# Altium PCB SuscoderPCB.PcbDoc
Units mm, origin at the board's own origin, x right, y up, seen from the top; angles counter-clockwise.
Board outline 25.4 x 25.4 mm, 2 copper layers (Top Layer, Bottom Layer); 11 components, 9 nets, 40 pads, 12 vias.
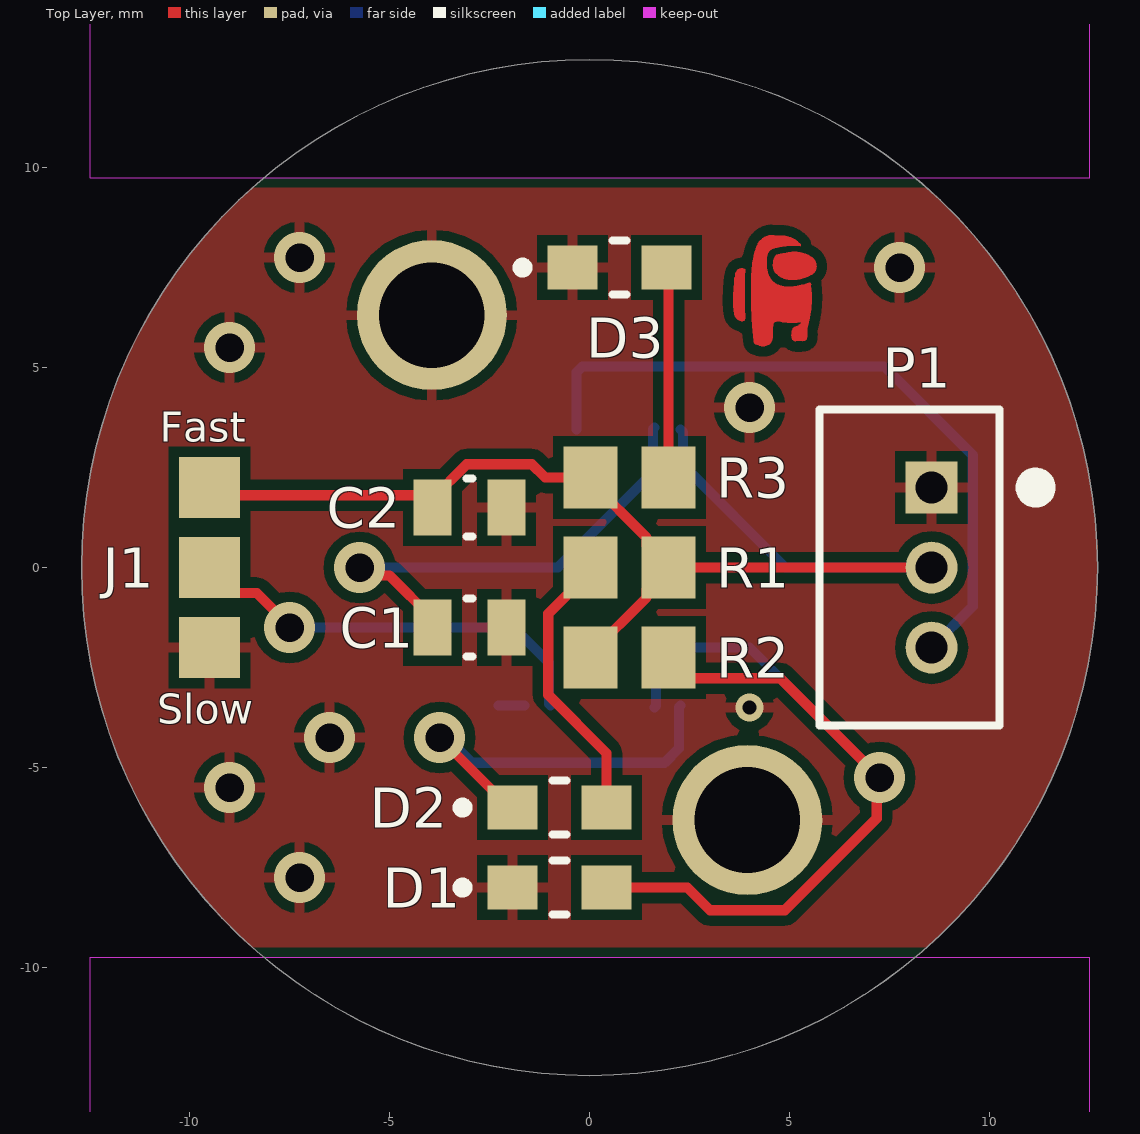
[diagram p0: Top Layer view]
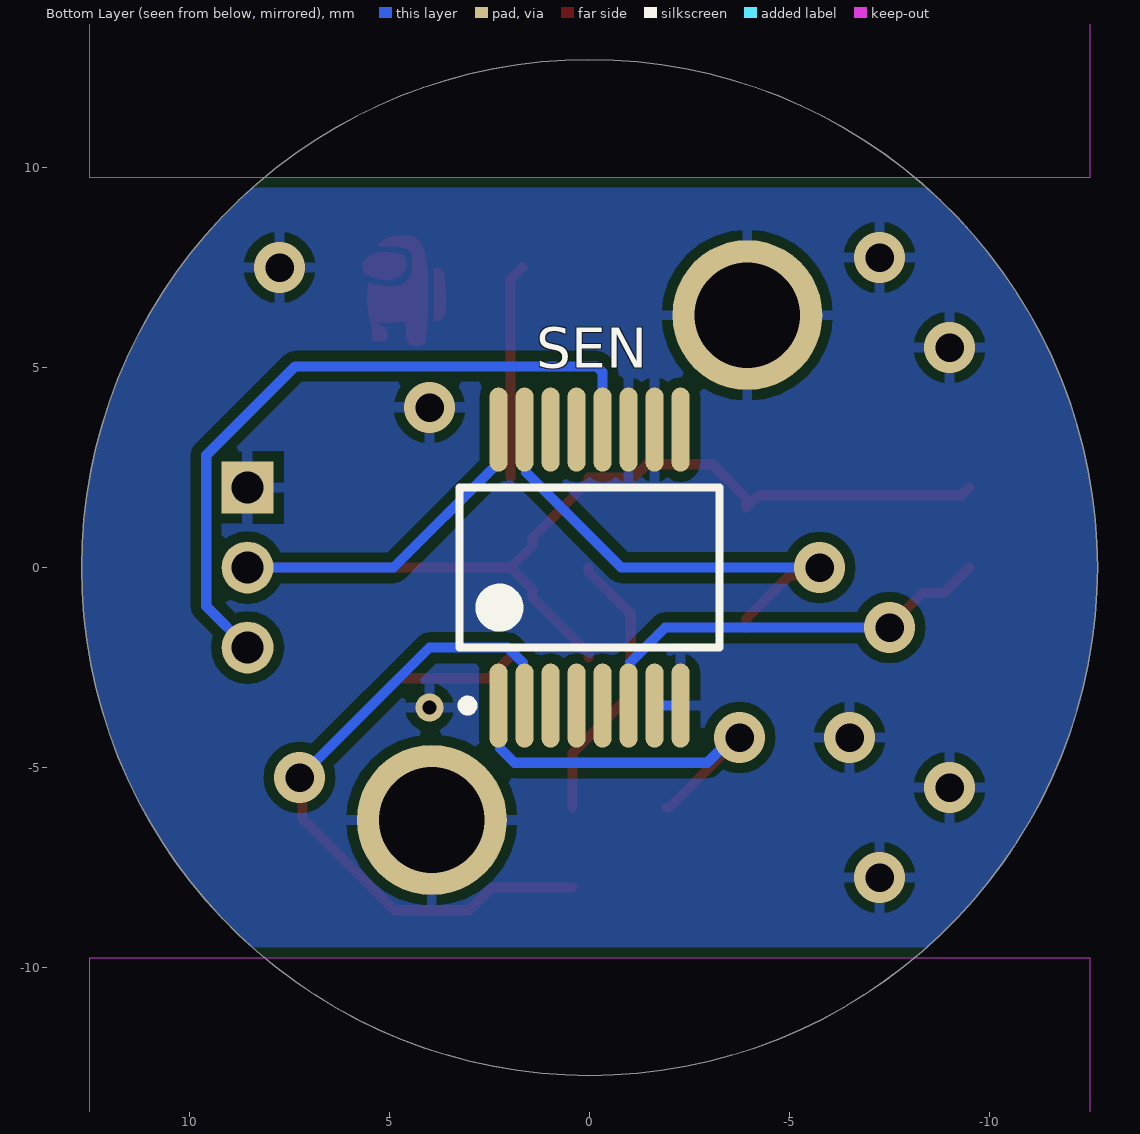
[diagram p1: Bottom Layer view, seen from below]
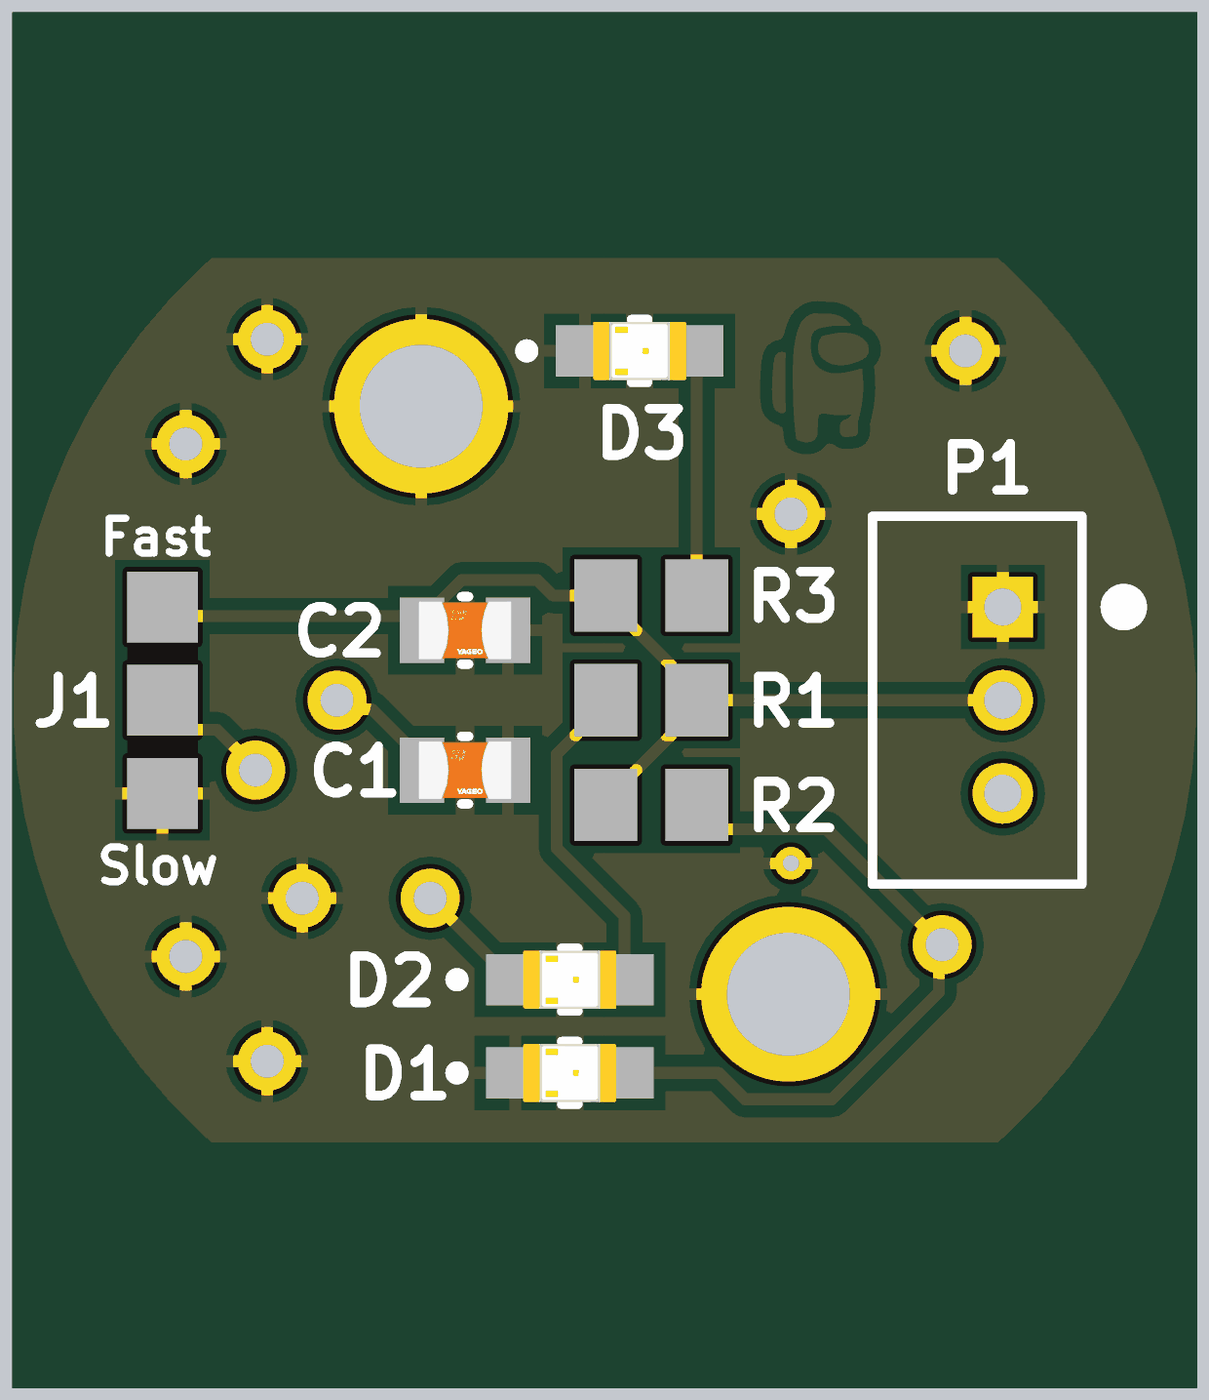
[diagram p2: 3D render of the assembled board from above, using the file's embedded part models]

## Layer stack, top to bottom
Top Solder: solder mask 0.0102, Solder Resist, Dk 3.5
Top Layer: signal copper 0.0356
Dielectric 1: dielectric 0.32, FR-4, Dk 4.8
Bottom Layer: signal copper 0.0356
Bottom Solder: solder mask 0.0102, Solder Resist, Dk 3.5

## Board outline
0,-12.7 cw(c0,0) -12.7,0 cw(c0,0) 0,12.7 cw(c0,0) 12.7,0 cw(c0,0)
cut-out: -12.5,-14.75 12.5,-14.75 12.5,-9.75 -12.5,-9.75
cut-out: -12.5,9.75 12.5,9.75 12.5,14.75 -12.5,14.75

## Design rules (kind name [scope] priority, off if disabled: settings)
Clearance [All] p1: gap=0.254 ignorepadtopadclearanceinfootprint=TRUE except(0: Arc-Hole Track-Hole SMDPad-Hole THPad-Hole Via-Hole Fill-Hole Poly-Hole Region-Hole Text-Hole)
HoleSize [IsVia] p1: absolutevalues=TRUE maxlimit=2.54 minlimit=0.025 maxpercent=80.000 minpercent=20.000
PolygonConnect [All] p1: connectstyle=Relief reliefconductorwidth=0.254 reliefentries=4 polygonreliefangle="90 Angle" airgapwidth=0.254
RoutingVias [All] p1: holewidth=0.711 width=1.27 viastyle="Through Hole" minholewidth=0.711 minwidth=1.27 maxholewidth=0.711 maxwidth=1.27
SolderMaskExpansion [All] p1: expansion=0.102 istentingtop=FALSE
Width [All] p1: maxlimit=0.254 minlimit=0.254 preferedwidth=0.254
29 further rules are at their usual default settings.

## Components (designator, comment, footprint, x,y, rotation, side; value= is the part's Value field where it differs from the comment)
C1 "CC0805KKX7R7BB475" FP-CC0805-0_85-MFG -3,-1.5 r0 top value="4.7 uF"
C2 "CC0805KRX7R7BB104" FP-CC0805-0_85-MFG -3,1.5 r0 top value="100 nF"
D1 "APT2012LZGCK" FP-APT2012LSYCK-J3-PRV-MFG -0.75,-8 r0 top
D2 "APT2012LSECK/J3-PRV" FP-APT2012LSYCK-J3-PRV-MFG -0.75,-6 r0 top
D3 "APT2012LSYCK/J3-PRV" FP-APT2012LSYCK-J3-PRV-MFG 0.75,7.5 r0 top
J1 "Tri-Pad Jumper" "Tri-Pad Jumper-Footprint-1" -9.5,0 r0 top
P1 "B3B-PH-K-S(LF)(SN)" JST-B3B-PH-K-S-3_V 8,0 r270 top
R1 "ERJ-6ENF1501V" RESC2013X70X40ML20T20 1,0 r0 top
R2 "ERJ6ENF1201V" RESC2013X70X40ML20T20 1,-2.25 r180 top
R3 "ERJ-6ENF1501V" RESC2013X70X40ML20T20 1,2.25 r180 top
SEN "AS5045ASST" AMS-SSOP-16-6200X5300DE_A_N 0,0 r90 bottom locked

## Footprints (in the part's own frame and the unit in brackets; to place one, negate y for a bottom-side part, rotate by r counter-clockwise, add the part's x,y. Pads: shape width x height; smd on the part's side, far side on the other; paste and mask are expansions set on the pad)
AMS-SSOP-16-6200X5300DE_A_N [mm] "SOP, 16-Leads, Body 6.2x5.3mm, Pitch 0.65mm, IPC Medium Density"
  oval 2.1x0.45 smd: 1(-3.45,2.275) 2(-3.45,1.625) 3(-3.45,0.975) 4(-3.45,0.325) 5(-3.45,-0.325) 6(-3.45,-0.975) 7(-3.45,-1.625) 8(-3.45,-2.275) 9(3.45,-2.275) 10(3.45,-1.625) 11(3.45,-0.975) 12(3.45,-0.325) 13(3.45,0.325) 14(3.45,0.975) 15(3.45,1.625) 16(3.45,2.275)
  silkscreen extent -3.57,-3.25 2,3.25, body extent -2.8,-3.25 2.8,3.25, height 2
FP-APT2012LSYCK-J3-PRV-MFG [mm]
  rect 1.25x1.1 smd paste+0 mask+0: 1(-1.175,0) 2(1.175,0)
  silkscreen extent -2.55,-0.67 0.18,0.67, body extent -1.9,-0.77 1.9,0.77, height 0.25
FP-CC0805-0_85-MFG [mm]
  rect 0.95x1.4 smd paste+0 mask+0: 1(-0.925,0) 2(0.925,0)
  silkscreen extent -0.07,-0.72 0.08,0.72, body extent -1.6,-1.05 1.6,1.05, height 0.25
JST-B3B-PH-K-S-3_V [mm] "Connector, 3-Leads, Body 7.9x4.5mm, Pitch 2mm"
  rect 1.3x1.3 hole 0.8: 1(-2,0.55)
  round 1.3 hole 0.8: 2(0,0.55) 3(2,0.55)
  silkscreen extent -3.95,-2.25 3.95,3.4, body extent -3.95,-2.25 3.95,2.25, height 6
RESC2013X70X40ML20T20 [mm] "Chip Resistor, 2-Leads, Body 2.00x1.25mm, IPC Low Density"
  rect 1.35x1.55 smd: 1(-0.975,0) 2(0.975,0)
  body extent -1.1,-0.72 1.1,0.72, height 0.7
"Tri-Pad Jumper-Footprint-1" [mil]
  rect 60x60 smd: 1(0,78.74) 2(0,0) 3(0,-78.74)

## Part data
C1: library part CMP-03422-000207-1, "CAP CER 4.7UF 16V X7R 0805", Capacitance="4.7 uF", Manufacturer=Yageo, Package=CC0805-0.85, Temperature="-30°C to +85°C", Temperature Characteristic=X7R, Temperature Range High=+85°C, Temperature Range Low=-30°C, Tolerance=0.1, Voltage Rating="16 V", Automotive=No, Category=Cap, ComponentLink2Description=Datasheet, ComponentLink2URL=http://www.yageo.com/documents/recent/UPY-GPHC_Y5V_6.3V-to-50V_8.pdf, Device Class L1="Passive Components", Device Class L2=Capacitors, Device Class L3="Ceramic Capacitors", Digikey Description="CAP CER 4.7UF 16V X7R 0805", Footprint Url=http://www.yageo.com/exep/pages/download/literatures/UPY-C_GEN_24.pdf, Height=0.95mm, Ipc Land Pattern Name=CAPC200125X85, Lead Free=Yes, Manufacturer Part Number=CC0805KKX7R7BB475, Material=Ceramic, Mouser Description="Multilayer Ceramic Capacitors MLCC - SMD/SMT 4.7M pF 10% 16 Volts", Octopart=https://octopart.com/cc0805kkx7r7bb475-yageo-34429188, RoHS=TRUE
C2: library part CMP-1036-04402-6, "CAP CER 0.1UF 16V X7R 0805", Capacitance="100 nF", Manufacturer=Yageo, Package=CC0805-0.85, Temperature="-30°C to +85°C", Temperature Characteristic=X7R, Temperature Range High=+85°C, Temperature Range Low=-30°C, Tolerance=0.1, Voltage Rating="16 V", Automotive=No, Category=Cap, ComponentLink2Description=Datasheet, ComponentLink2URL=http://www.yageo.com/documents/recent/UPY-GPHC_Y5V_6.3V-to-50V_8.pdf, Device Class L1="Passive Components", Device Class L2=Capacitors, Device Class L3="Ceramic Capacitors", Digikey Description="CAP CER 0.1UF 16V X7R 0805", Footprint Url=http://www.yageo.com/exep/pages/download/literatures/UPY-C_GEN_24.pdf, Height=0.95mm, Ipc Land Pattern Name=CAPC200125X85, Lead Free=Yes, Manufacturer Part Number=CC0805KRX7R7BB104, Material=Ceramic, Mouser Description="Multilayer Ceramic Capacitors MLCC - SMD/SMT 100nF 16V X7R 10%", Octopart=https://octopart.com/cc0805krx7r7bb104-yageo-39467769, RoHS=TRUE
D1: library part CMP-007-00039-1, "2.0X1.2mm Low Current Green SMD LED; Water Clear; 525nm; 140° Viewing Angle"
D2: library part CMP-007-00037-1, "2.0X1.2mm Low Current Red SMD LED; Water Clear; 625nm; 140° Viewing Angle"
D3: library part CMP-44529-000012-1, "LED YELLOW CLEAR 2SMD", Colour=Yellow, Forward Current=2mA, Forward Voltage=1.85V, Manufacturer=Kingbright, Max Junction Temp=+115°C, Package=0, Power Dissipation=75mW, Reverse Voltage=5V, Temperature="-40°C to +85°C", Temperature Range High=+85°C, Temperature Range Low=-40°C, Automotive=No, Category=Diode, ComponentLink2Description=Datasheet, ComponentLink2URL=http://www.kingbrightusa.com/images/catalog/SPEC/APT2012LSYCK-J3-PRV.pdf, Device Class L1=Optoelectronics, Device Class L2=LEDs, Device Class L3=unset, Digikey Description="LED YELLOW CLEAR 2SMD", Height=0.85mm, Lead Free=Yes, Led Orientation="Top View", Luminous Intensity=25mcd, Manufacturer Part Number=APT2012LSYCK/J3-PRV, Mouser Description="Standard LEDs - SMD 2.0X1.2MM LOW CRNT", Octopart=https://octopart.com/apt2012lsyck%2Fj3-prv-kingbright-56784114, Peak Emmision Wavelength=590nm, RoHS=TRUE, Viewing Angle=140°, Wavelength=590nm
J1: library part CMP-00000-1, "A jumper with 3 pads."
P1: library part CMP-2000-05164-1, "Male Header, Pitch 2 mm, 1 x 3 Position, Height 6 mm, Tail Length 3.4 mm, -25 to 85 degC, RoHS, Bulk", Manufacturer=JST, Datasheet URL=https://datasheet.ciiva.com/11746/0900766b80826550-11746939.pdf, Datasheet Version=Oct-06, Manufacturer URL=http://www.jst.com/home2.html, No of Positions=3, Pitch=2mm, Style/Orientation=StraightHeader/Plug, Termination=Crimp, Type=ShroudedHeader
R1 R3: library part CMP-2001-04438-1, Manufacturer=Panasonic, Resistance="1.5 kOhms", Part Number=ERJ-6ENF1501V
R2: library part CMP-2001-00512-1, Manufacturer=Panasonic, Resistance="1.2 kOhms", Part Number=ERJ6ENF1201V
SEN: library part CMP-0555-00017-2, "12 Bit Programmable Magnetic Rotary Encoder, 3.3 or 5 V, SSOP-16, Pb-Free, Reel", Manufacturer=AMS, Supply Voltage (V)="3.3 or 5.0", Code_JEDEC="MO - 150 AC", ComponentLink1Description="Manufacturer URL", ComponentLink1URL=www.ams.com, ComponentLink2Description=Datasheet, ComponentLink2URL=http://www.ams.com/eng/content/download/1288/7223/496, DatasheetVersion="Rev. 1.7", Features="pin-compatible to AS5040, higher resolution", Mounting Technology="Surface Mount", Output="absolute serial SSI, PWM", PackageDescription="16-Pin Shrink Small Outline Package, 6.2 x 5.3 mm Body, 0.65 mm Pitch", PackageReference=SSOP-16, PackageVersion="Rev. 1.7, 06/2010", PartNumber=AS5045ASST, Resolution="12 bit"

## Free pads (board coordinates)
  round 3.75 hole 2.642: MH(-3.944,6.311) MH(3.944,-6.311)

## Via types
v1: diameter 1.27, hole 0.711, Top Layer to Bottom Layer, 11 vias
v2: diameter 0.7, hole 0.35, Top Layer to Bottom Layer, 1 vias

## Nets (pads, with @x,y where several pads share a name; then routed paths per layer and width w, separated by ;. In a path a pad name is that pad's centre, name@x,y a point inside that pad or via, vN(x,y) a via of type N, cw(c..) or ccw(c..) an arc to the next point about the centre after c; other vN are vias at no path point)
GND: C1.2 C2.2 D1.1 D3.1 J1.3 P1.1 pad.MH SEN.7 SEN.8 SEN.10 SEN.11 | length 0.7
  Bottom Layer w0.254: SEN.8 SEN.7
  other v1: -7.25,-7.75 -9,-5.5 -6.5,-4.25 4,4 -9,5.5 7.75,7.5 -7.25,7.75
  other v2: 4,-3.5
NetC1_1: C1.1 SEN.15 | length 12
  Top Layer w0.254: v1(-5.75,0) -5.556,-0.194 -5.006,-0.194 -3.925,-1.275 C1.1
  Bottom Layer w0.254: v1(-5.75,0) -0.793,0 1.587,2.38 1.587,3.463 SEN.15@1.625,3.5
NetC2_1: C2.1 J1.1 P1.2 R1.2 R2.2 R3.2 SEN.16 | length 31.3
  Top Layer w0.254: J1.1 -9.308,1.808 -4.233,1.808 C2.1 -3.925,1.725 -3.069,2.581 -1.442,2.581 -1.111,2.25 R3.2 0.025,2.15 1.427,0.748 1.427,0.548 R1.2 ; R2.2 0.025,-2.15 1.427,-0.748 1.427,-0.548 R1.2 ; P1.2 R1.2
  Bottom Layer w0.254: SEN.16 2.339,3.386 2.339,2.561 4.9,0 P1.2
NetD1_2: D1.2 R2.1 SEN.2 | length 23.6
  Top Layer w0.254: D1.2 2.442,-8 3.009,-8.567 4.878,-8.567 7.18,-6.266 7.18,-5.32 v1(7.25,-5.25) ; R2.1@1.989,-2.236 2.522,-2.769 4.769,-2.769 7.07,-5.07 v1@7.18,-5.07
  Bottom Layer w0.254: SEN.2@1.625,-3.5 1.663,-3.463 1.663,-2.38 2.043,-2 4,-2 v1(7.25,-5.25)
NetD2_1: D2.1 SEN.1 | length 10
  Top Layer w0.254: v1(-3.75,-4.25) -2,-6 D2.1
  Bottom Layer w0.254: v1(-3.75,-4.25) -3.575,-4.25 -2.944,-4.881 1.876,-4.881 2.237,-4.52 2.237,-3.488 SEN.1
NetD2_2: D2.2 R1.1 | length 7
  Top Layer w0.254: R1.1 0.025,-0.1 -1.031,-1.156 -1.031,-3.183 0.425,-4.639 D2.2
NetD3_2: D3.2 R3.1 | length 5.4
  Top Layer w0.254: D3.2@1.675,7.508 1.975,7.208 R3.1
NetJ1_2: J1.2 SEN.6 | length 10.6
  Top Layer w0.254: J1.2 -8.865,-0.635 -8.322,-0.635 -7.5,-1.457 v1(-7.5,-1.5)
  Bottom Layer w0.254: v1(-7.5,-1.5) -1.893,-1.5 -1.013,-2.38 -1.013,-3.412 SEN.6
NetP1_3: P1.3 SEN.12 | length 17.6
  Bottom Layer w0.254: SEN.12 -0.325,4.881 -0.176,5.03 7.359,5.03 9.581,2.808 9.581,-0.969 P1.3
pads on no net: SEN.3 SEN.4 SEN.5 SEN.9 SEN.13 SEN.14

## Polygon pours and split planes (outlines as drawn)
GND on Top Layer "GND_L01_P001" (solid, remove dead copper, pour order 1): 0,-12.7 cw(c0,0) -12.7,0 cw(c0,0) 0,12.7 cw(c0,0) 12.7,0 cw(c0,0)
GND on Bottom Layer "GND_L02_P002" (solid, pour order 2): 0,-12.7 cw(c0,0) -12.7,0 cw(c0,0) 0,12.7 cw(c0,0) 12.7,0 cw(c0,0)

## Other copper
Top Layer:
  region: 477 vertices and 1 holes, not listed, extent 4.041,5.537 5.554,8.308
  region: 175 vertices and 0 holes, not listed, extent 4.583,7.191 5.674,7.893
  region: 3.889,7.4 3.887,7.366 3.885,7.347 3.883,7.33 3.882,7.311 3.88,7.294 3.878,7.276 3.877,7.206 3.879,7.201 3.881,6.448 3.882,6.443 3.884,6.389 3.886,6.384 3.888,6.352 3.892,6.318 3.893,6.298 3.894,6.24 3.893,6.235 3.89,6.222 3.888,6.215 3.882,6.198 3.875,6.188 3.872,6.186 3.871,6.182 3.865,6.176 3.861,6.175 3.858,6.171 3.846,6.166 3.834,6.163 3.822,6.161 3.792,6.163 3.787,6.165 3.78,6.166 3.754,6.176 3.735,6.184 3.721,6.192 3.707,6.2 3.704,6.202 3.689,6.214 3.679,6.221 3.663,6.238 3.661,6.242 3.657,6.245 3.656,6.248 3.652,6.252 3.651,6.255 3.642,6.269 3.634,6.287 3.627,6.304 3.622,6.323 3.619,6.335 3.613,6.363 3.612,6.37 3.608,6.405 3.605,6.428 3.603,6.445 3.602,6.456 3.6,6.483 3.598,6.49 3.596,6.535 3.594,6.571 3.592,6.633 3.592,6.698 3.593,6.703 3.595,6.813 3.597,6.818 3.598,6.881 3.6,6.886 3.602,6.937 3.603,6.942 3.606,6.99 3.614,7.113 3.617,7.163 3.619,7.175 3.621,7.225 3.623,7.24 3.631,7.254 3.634,7.261 3.636,7.284 3.638,7.298 3.643,7.332 3.645,7.34 3.646,7.347 3.648,7.355 3.658,7.384 3.662,7.393 3.676,7.417 3.688,7.432 3.704,7.448 3.707,7.45 3.711,7.453 3.714,7.455 3.724,7.462 3.74,7.469 3.751,7.473 3.764,7.476 3.774,7.478 3.798,7.48 3.805,7.481 3.811,7.479 3.834,7.477 3.839,7.475 3.85,7.473 3.864,7.47 3.872,7.466 3.884,7.459 3.886,7.456 3.889,7.453 3.892,7.443 3.893,7.424 3.891,7.419 3.889,7.402

## Silkscreen, mask and mechanical layers (free items; w line width, h text height)
Top Overlay:
  text "Fast" at -10.75,3.15 h0.75
  text "Slow" at -10.812,-3.9 h0.75
Mechanical 1:
  circle w0.254: c0,40.716 r31
  circle w0.254: c0,-40.716 r31
  circle w0.254: c0,0 r12.7
  lines w0.254: -3.944,6.311 ccw(c0,0) 3.944,-6.311 ; -12.5,-14.75 12.5,-14.75 12.5,-9.75 -12.5,-9.75 -12.5,-14.75 ; -12.5,9.75 12.5,9.75 12.5,14.75 -12.5,14.75 -12.5,9.75